# Altium PCB Weather Station v3 Home Edition.PcbDoc
Units mm, origin at the board's own origin, x right, y up, seen from the top; angles counter-clockwise.
Board outline 142.4 x 107.4 mm, 2 copper layers (Top Layer, Bottom Layer); 49 components, 44 nets, 199 pads, 33 vias.
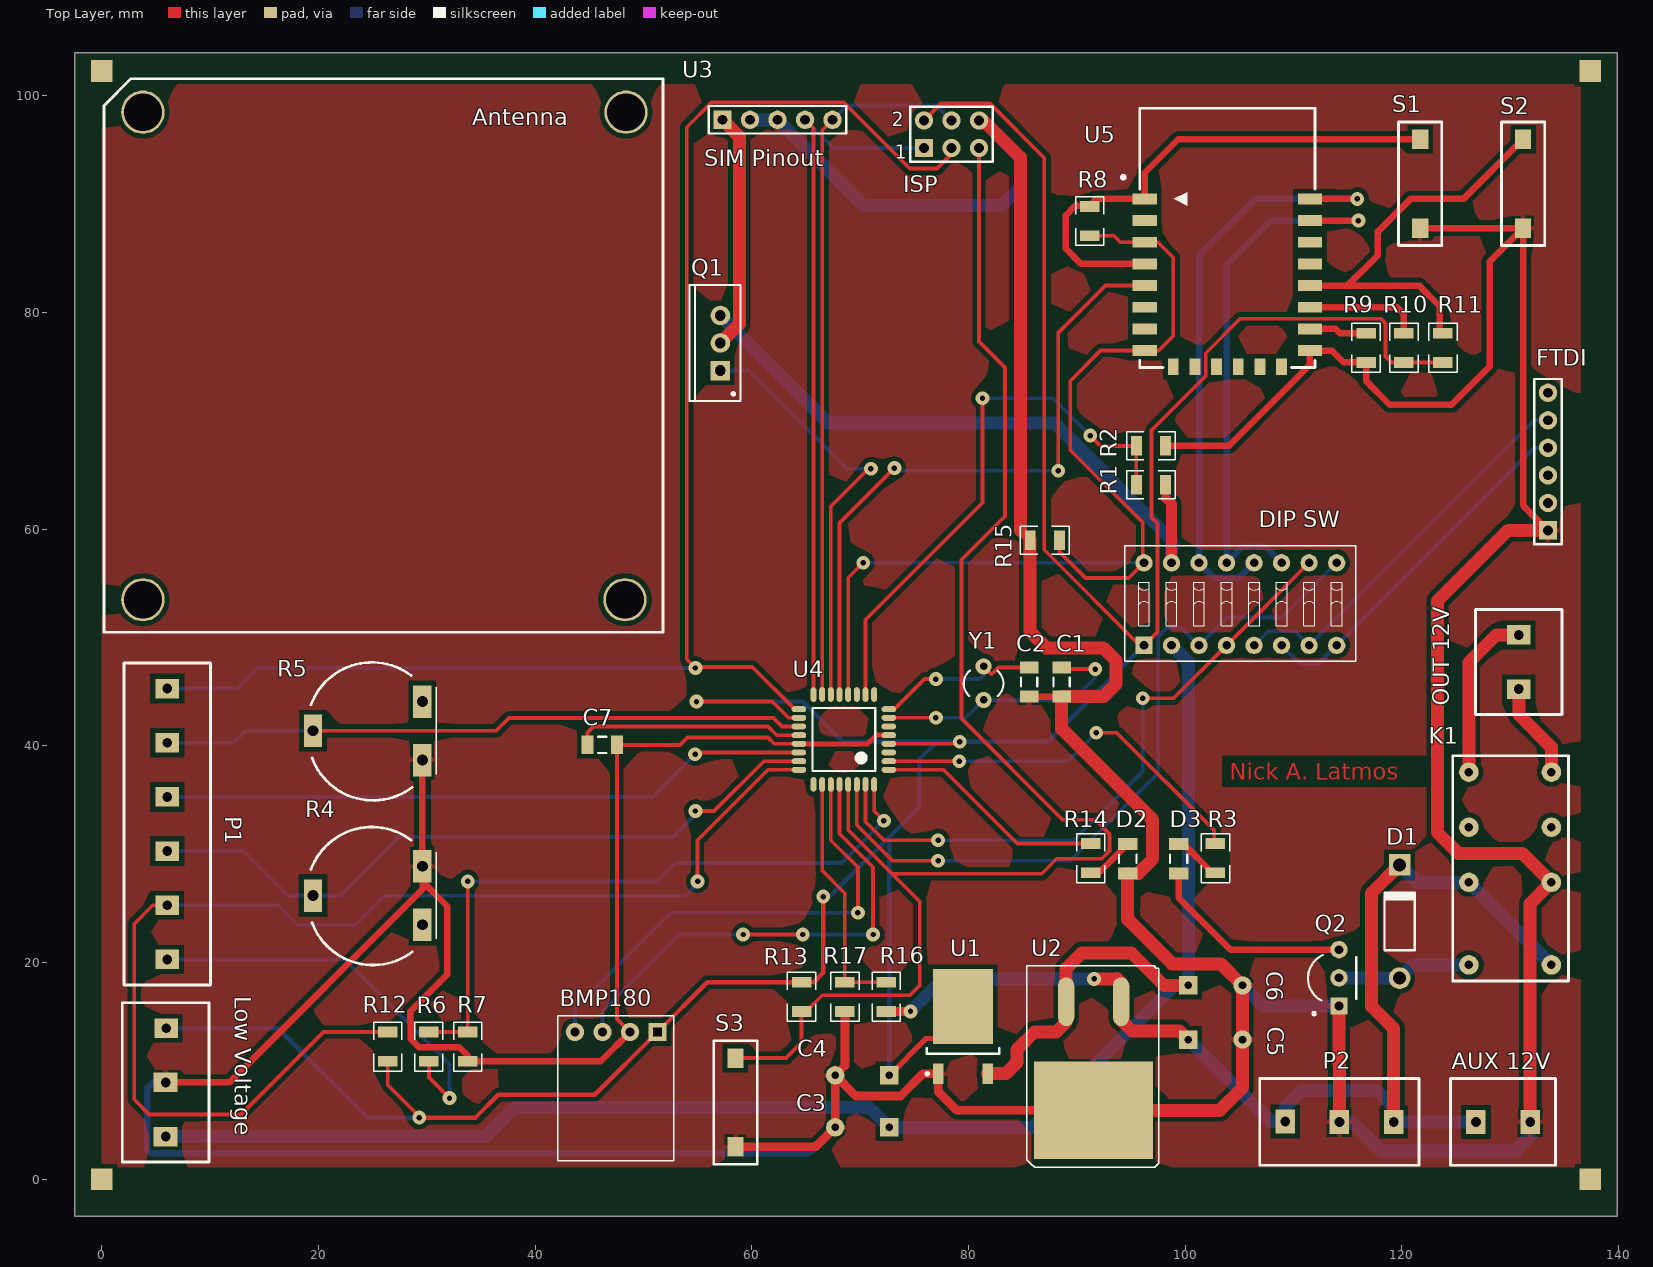
[diagram p0: Top Layer view]
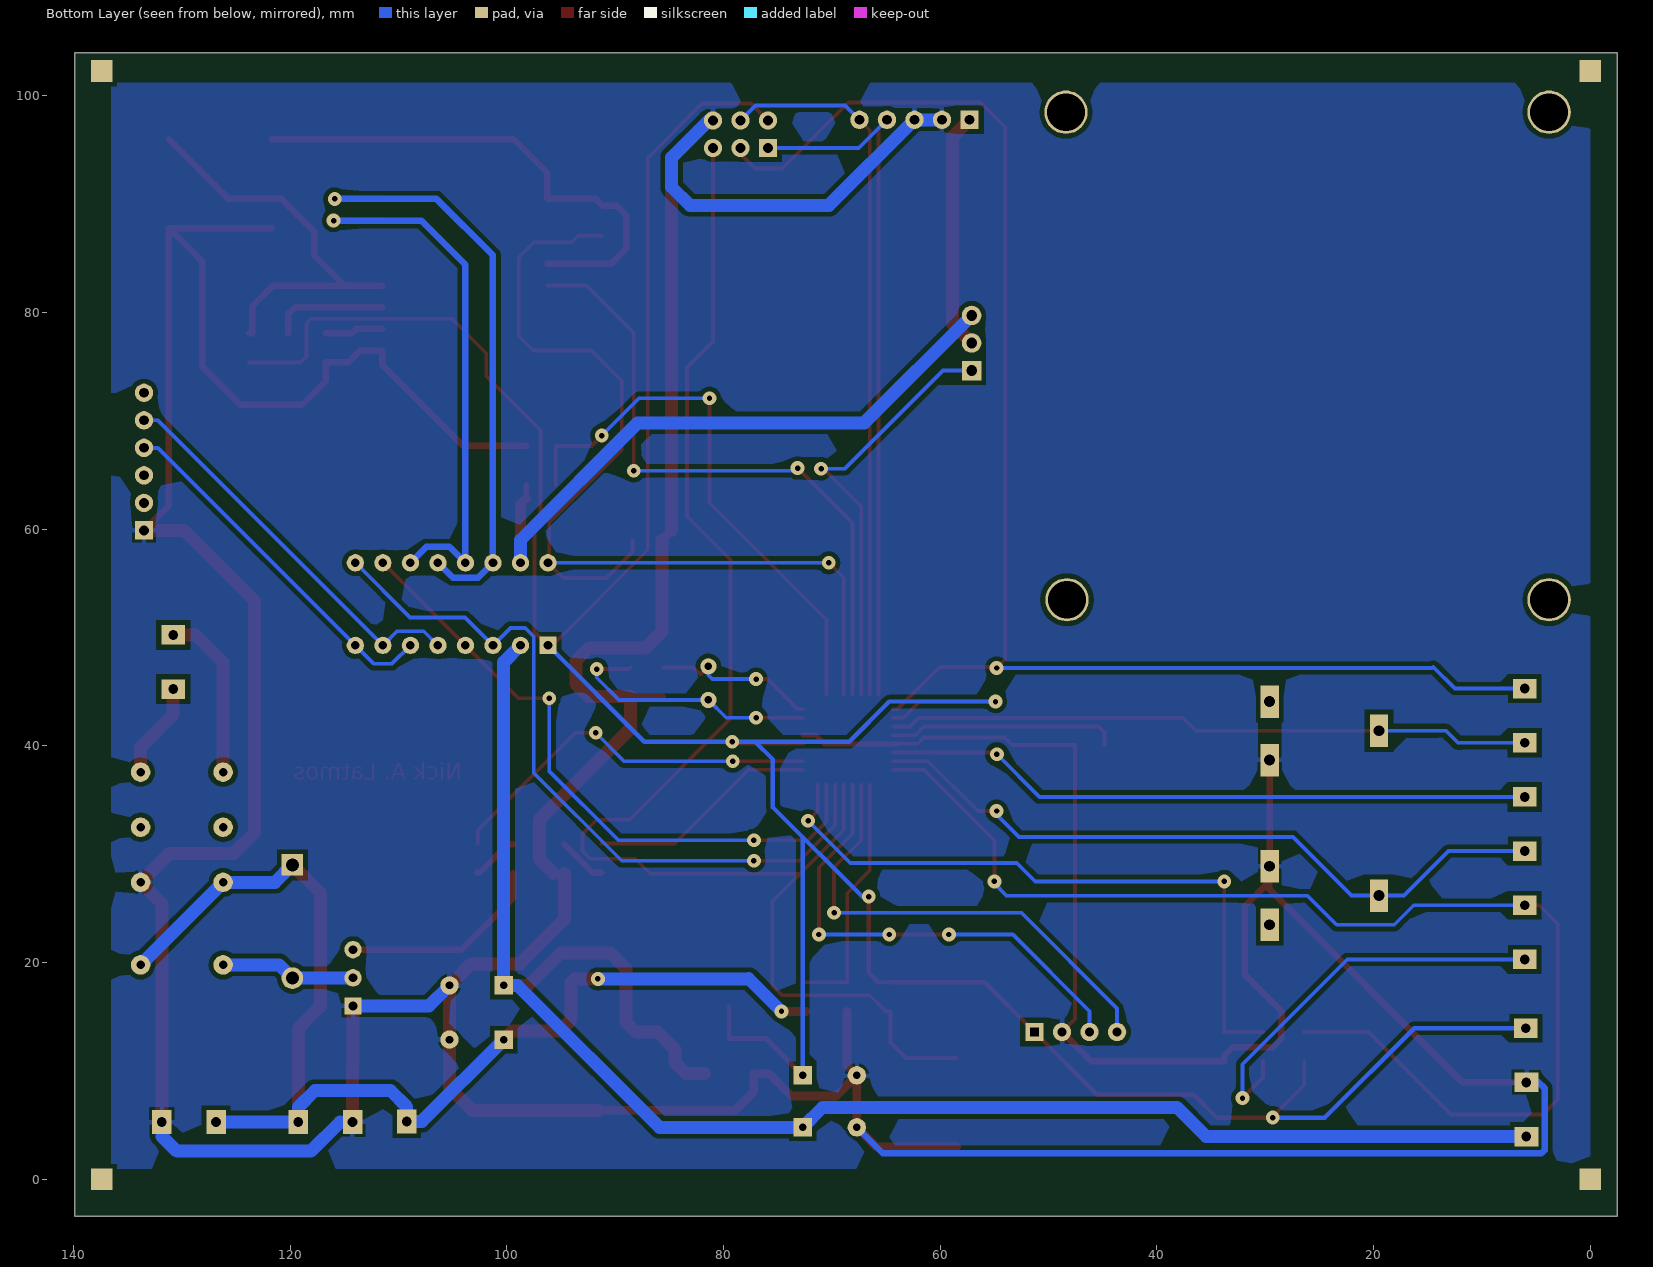
[diagram p1: Bottom Layer view, seen from below]

## Layer stack, top to bottom
Top Solder: solder mask 0.0102, Solder Resist, Dk 3.5
Top Layer: signal copper 0.0356
Dielectric 1: dielectric 0.32, FR-4, Dk 4.8
Bottom Layer: signal copper 0.0356
Bottom Solder: solder mask 0.0102, Solder Resist, Dk 3.5

## Board outline
-2.5,-3.4 -2.5,104 139.9,104 139.9,-3.4 -2.5,-3.4

## Design rules (kind name [scope] priority, off if disabled: settings)
Clearance "Polygon Clearance" [inPolygon] p1: gap=0.45
Clearance "HV to other nets Clearance" [InNetClass('HV')] p2: gap=0.254
Clearance "HV to HV Clearance" [InNetClass('HV') vs InNetClass('HV')] p3: gap=0.4
Clearance [All] p4: gap=0.254
HoleSize [All] p1: absolutevalues=TRUE maxlimit=4 minlimit=0.3 maxpercent=80.000 minpercent=20.000
HoleToHoleClearance [All] p1: gap=0.31 allowstackedmicrovias=TRUE
MinimumSolderMaskSliver [All] p1: minsoldermaskwidth=0.32
PolygonConnect [All] p1: connectstyle=Relief reliefconductorwidth=0.4 reliefentries=4 polygonreliefangle="90 Angle" airgapwidth=0.254
RoutingVias [All] p1: holewidth=0.5 width=1.27 viastyle="Through Hole" minholewidth=0.5 minwidth=1.27 maxholewidth=0.7 maxwidth=1.27
RoutingVias "HV vias" [InNetClass('HV')] p2: holewidth=0.7 width=1.4 viastyle="Through Hole" minholewidth=0.7 minwidth=1.4 maxholewidth=0.9 maxwidth=1.4
SMDNeckDown [All] p1: percent=85.000
SilkToSolderMaskClearance [IsPad] p1: minsilkscreentomaskgap=0.17 clearancetoexposedcopper=FALSE
SolderMaskExpansion [All] p1: expansion=0.102
UnpouredPolygon [All] p1: allowunpoured=FALSE
Width "GND Width" [InNet('GND')] p1: maxlimit=1.2 minlimit=0.35 preferedwidth=0.6
Width "Sensors Width" [InNetClass('Sensors')] p2: maxlimit=0.4 minlimit=0.254 preferedwidth=0.35
Width "Processor Width" [InNetClass('Processor')] p3: maxlimit=0.4 minlimit=0.254 preferedwidth=0.35
Width "LV Width" [InNetClass('LV')] p4: maxlimit=0.7 minlimit=0.4 preferedwidth=0.6
Width "HV Width" [InNetClass('HV')] p5: maxlimit=1.4 minlimit=1 preferedwidth=1.2
Width [All] p6: maxlimit=0.35 minlimit=0.254 preferedwidth=0.35
25 further rules are at their usual default settings.

## Classes and differential pairs
net class HV: 5V 12V_BAT GND GPRS_ENABLE MOSFET_DRAIN NetD1_1 NetK1_8 NetK1_9
net class LV: 3.3V CONNECTION_STATUS_LED GND GPRS_CONTROL_PIN GPRS_STATUS NetD2_1 NetD3_1 NetD3_2 NetR8_1 NetR9_1 NetR10_1 NetR11_1 ROUTER VALVE_CONTROL_PIN WIFI_ENABLE WIFI_RX WIFI_TX
net class Processor: 3.3V BATTERY_VOLTAGE CONNECTION_STATUS_LED DHT22_DATA DS18B20_DQ FLOW_METER GND GPRS_CONTROL_PIN GPRS_STATUS LDR_PIN MCU_RX0 MCU_RX1 MCU_TX0 MCU_TX1 NetC1_2 NetC2_1 NetC7_2 NetISP_5 RAIN_PIN ROUTER SCL0 SDA0 VALVE_CONTROL_PIN WIFI_ENABLE WIND_SENSOR
net class Sensors: 3.3V DHT22_DATA DS18B20_DQ FLOW_METER GND LDR_PIN NetP1_6 RAIN_PIN SCL0 SDA0 WIND_SENSOR

## Components (designator, comment, footprint, x,y, rotation, side; value= is the part's Value field where it differs from the comment)
"AUX 12V" "AUX 12V" "Connector (Clamp?)" 124.5,1.3 r0 top
BMP180 "BMP180" BMP180 53.1,14.6 r180 top
C1 "Cap Semi" C1206 88.6,45.9 r90 top
C2 "Cap Semi" C1206 85.6,45.9 r270 top
C3 "Cap2" CAPR5-4X5 70.2,4.8 r180 top
C4 "Cap2" CAPR5-4X5 70.2,9.6 r180 top
C5 "Cap2" CAPR5-4X5 102.8,12.9 r0 top
C6 "Cap2" CAPR5-4X5 102.8,17.9 r0 top
C7 "Cap Semi" C1206 46.2,40.1 r180 top
D1 "Diode 1N4004" DO-41 119.8,23.8 r90 top
D2 "LED0" INDC3216 94.7,29.6 r270 top
D3 "LED0" INDC3216 99.4,29.6 r270 top
"DIP SW" "418117170908" 418117170908 105.1,53.1 r0 top
FTDI "Header 6" HDR1X6 133.5,59.9 r90 top
ISP "Header 3X2" HDR2X3 75.9,95.2 r0 top
K1 "Relay-DPDT" "Sanyou Relay" 135,18.8 r90 top
"Low Voltage" "Clamp x3" "Connector x3 clamps" 9.9,1.6 r90 top
"OUT 12V" "Homemade Connector" "Connector (Clamp?)" 126.8,52.6 r270 top
P1 "Clamp" "Connector Clamp 6" 6,31.3 r270 top
P2 "Clamp x3" "Connector x3 clamps" 121.6,9.3 r180 top
Q1 "PMOS-2" TO-220AB 57.1,77.2 r90 top
Q2 "BC639-16ZL1G" ONSC-TO-92-3-29-11_AM_BL 114.2,18.6 r90 top
R1 "smd resistor 4x2mm" "smd resistor 4x2mm" 98.9,63 r90 top
R2 "smd resistor 4x2mm" "smd resistor 4x2mm" 98.9,66.6 r90 top
R3 "smd resistor 4x2mm" "smd resistor 4x2mm" 101.7,27.6 r0 top
R4 "RPot" "potentiometer (Piher)" 30.5,22.2 r90 top
R5 "RPot" "potentiometer (Piher)" 30.5,37.4 r90 top
R6 "smd resistor 4x2mm" "smd resistor 4x2mm" 29.1,10.2 r0 top
R7 "smd resistor 4x2mm" "smd resistor 4x2mm" 32.7,10.2 r0 top
R8 "smd resistor" "smd resistor 4x2mm" 92.3,90.5 r180 top
R9 "smd resistor 4x2mm" "smd resistor 4x2mm" 117.8,78.8 r180 top
R10 "smd resistor 4x2mm" "smd resistor 4x2mm" 121.3,78.8 r180 top
R11 "smd resistor 4x2mm" "smd resistor 4x2mm" 124.9,78.8 r180 top
R12 "smd resistor 4x2mm" "smd resistor 4x2mm" 27.5,14.3 r180 top
R13 "smd resistor 4x2mm" "smd resistor 4x2mm" 63.5,14.8 r0 top
R14 "smd resistor 4x2mm" "smd resistor 4x2mm" 90.2,27.6 r0 top
R15 "smd resistor 4x2mm" "smd resistor 4x2mm" 89.1,57.9 r90 top
R16 "smd resistor 4x2mm" "smd resistor 4x2mm" 71.3,14.8 r0 top
R17 "smd resistor 4x2mm" "smd resistor 4x2mm" 69.7,18.9 r180 top
S1 "SW-PB" "SMD push button 10x4" 121.7,86.9 r0 top
S2 "SW-PB" "SMD push button 10x4" 131.2,96.9 r180 top
S3 "SW-PB" "SMD push button 10x4" 58.5,12.1 r180 top
"SIM Pinout" "Header 5" HDR1X5 57.3,97.8 r0 top
U1 "LM1117DT-3.3" TD03B_N 79.5,14.1 r90 top
U2 "L7805" D2PAK 94.1,16.4 r180 top
U3 "SIM900" SIM900 1.8,51.5 r0 top
U4 "ATmega328P-AU" 32A_L 68.5,40.6 r180 top
U5 "ESP_12_E" ESP_12_E 95.9,90.5 r0 top
Y1 "XTAL" R38 81.4,45.8 r180 top

## Footprints (in the part's own frame and the unit in brackets; to place one, negate y for a bottom-side part, rotate by r counter-clockwise, add the part's x,y. Pads: shape width x height; smd on the part's side, far side on the other; paste and mask are expansions set on the pad)
32A_L [mm] "Thin QFP, 32-Leads, Body 7x7mm, Pitch 0.8mm, IPC High Density"
  oval 1.35x0.546 smd mask+0.15: 1(-4.15,2.8) 2(-4.15,2) 3(-4.15,1.2) 4(-4.15,0.4) 5(-4.15,-0.4) 6(-4.15,-1.2) 7(-4.15,-2) 8(-4.15,-2.8) 17(4.15,-2.8) 18(4.15,-2) 19(4.15,-1.2) 20(4.15,-0.4) 21(4.15,0.4) 22(4.15,1.2) 23(4.15,2) 24(4.15,2.8)
  oval 0.546x1.35 smd mask+0.15: 9(-2.8,-4.15) 10(-2,-4.15) 11(-1.2,-4.15) 12(-0.4,-4.15) 13(0.4,-4.15) 14(1.2,-4.15) 15(2,-4.15) 16(2.8,-4.15) 25(2.8,4.15) 26(2,4.15) 27(1.2,4.15) 28(0.4,4.15) 29(-0.4,4.15) 30(-1.2,4.15) 31(-2,4.15) 32(-2.8,4.15)
  silkscreen extent -2.9,-2.9 2.9,2.9, body extent -3.5,-3.5 3.5,3.5, height 1.2
418117170908 [mm] "08p, 2.54mm Pitch, Horizontal, Box Type, THT, flat Actuator, red, without Tape, Tube"
  rect 1.6x1.6 hole 0.8: 1(-8.89,-3.81)
  round 1.6 hole 0.8: 2(-6.35,-3.81) 3(-3.81,-3.81) 4(-1.27,-3.81) 5(1.27,-3.81) 6(3.81,-3.81) 7(6.35,-3.81) 8(8.89,-3.81) 9(8.89,3.81) 10(6.35,3.81) 11(3.81,3.81) 12(1.27,3.81) 13(-1.27,3.81) 14(-3.81,3.81) 15(-6.35,3.81) 16(-8.89,3.81)
  silkscreen extent -10.66,-5.3 10.66,5.4, body extent -10.66,-4.8 10.66,4.8, height 5.2
BMP180 [mm]
  rect 1.7x1.7 hole 0.8 square: 1(1.8,1)
  round 1.7 hole 0.8: 2(4.34,1) 3(6.88,1) 4(9.42,1)
  silkscreen extent 0.3,-0.5 11,12.9
C1206 [mm] "Chip Capacitor, Body 3.2x1.6mm, IPC High Density"
  rect 1.1x1.7 smd: 1(-1.35,0) 2(1.35,0)
  silkscreen extent -0.4,-0.75 0.4,0.75, body extent -1.7,-0.9 1.7,0.9, height 1.3
CAPR5-4X5 [mm] "Capacitor; 2 Leads"
  rect 1.7x1.7 hole 0.7: 1(-2.5,0)
  round 1.7 hole 0.7: 2(2.5,0)
"Connector (Clamp?)" [mm]
  rect 1.8x2.2 hole 0.9: 1(2.35,4) 2(7.35,4)
  silkscreen extent 0,0 9.7,8
"Connector Clamp 6" [mm]
  rect 1.8x2.2 hole 0.9: 1(-14,0.05) 2(-9,0.05) 3(-4,0.05) 4(1,0.05) 5(6,0.05) 6(11,0.05)
  silkscreen extent -16.35,-3.95 13.35,4.05
"Connector x3 clamps" [mm]
  rect 1.8x2.2 hole 0.9: 1(2.35,4) 2(7.35,4) 3(12.35,3.95)
  silkscreen extent 0,0 14.7,8
D2PAK [mm]
  oval 1.5x4.5 smd: 1(0,0) 3(5.08,0)
  rect 11x9 smd: 2(2.54,10.025)
  silkscreen extent -3.47,-3.3 8.7,15.3, body extent -2.62,0.05 7.59,13.54, height 3.81
DO-41 [mm] "Diode, Axial; Body 5.2 x 2.7 mm (LxDia. max), Lead Dia. 0.86 mm (max)"
  round 2 hole 1.2: 1(-5.23,0)
  rect 2x2 hole 1.2: 2(5.23,0)
  silkscreen extent -2.65,-1.4 2.75,1.4
ESP_12_E [mm] "ESP-12 Wi-Fi Module by AI-Thinker"
  rect 2.25x1 smd: 1(0.375,0) 2(0.375,-2) 3(0.375,-4) 4(0.375,-6) 5(0.375,-8) 6(0.375,-10) 7(0.375,-12) 8(0.375,-14) 15(15.625,-14) 16(15.625,-12) 17(15.625,-10) 18(15.625,-8) 19(15.625,-6) 20(15.625,-4) 21(15.625,-2) 22(15.625,0)
  rect 1x1.5 smd: 9(3,-15.5) 10(5,-15.5) 11(7,-15.5) 12(9,-15.5) 13(11,-15.5) 14(13,-15.5)
  silkscreen extent -1.75,-15.57 16.08,8.37, body extent 0,-15.49 16,8.51, height 2.75
HDR1X5 [mm] "Connector; Header; 5 Position"
  rect 1.7x1.7 hole 0.9: 1(0,0)
  round 1.7 hole 0.9: 2(2.54,0) 3(5.08,0) 4(7.62,0) 5(10.16,0)
  silkscreen extent -1.27,-1.27 11.43,1.27
HDR1X6 [mm] "Connector; Header; 6 Position"
  rect 1.7x1.7 hole 0.9: 1(0,0)
  round 1.7 hole 0.9: 2(2.54,0) 3(5.08,0) 4(7.62,0) 5(10.16,0) 6(12.7,0)
  silkscreen extent -1.27,-1.27 13.97,1.27
HDR2X3 [mm] "Connector; Header; 3x2 Position"
  rect 1.7x1.7 hole 0.9: 1(0,0)
  round 1.7 hole 0.9: 2(0,2.54) 3(2.54,0) 4(2.54,2.54) 5(5.08,0) 6(5.08,2.54)
  silkscreen extent -1.27,-1.27 6.35,3.81
INDC3216 [mm] "Chip Inductor, Body 3.2x1.6mm, IPC High Density"
  rect 1.1x1.8 smd: 1(-1.35,0) 2(1.35,0)
  silkscreen extent -0.4,-0.8 0.4,0.8, body extent -1.7,-0.9 1.7,0.9, height 0.55
ONSC-TO-92-3-29-11_AM_BL [mm] "TO, 3-Leads, Body Dia 4.7mm, Pitch 2.6mm"
  rect 1.6x1.6 hole 0.8: 1(-2.6,0)
  round 1.6 hole 0.8: 2(0,0) 3(2.6,0)
  silkscreen extent -3.42,-1.6 2.12,2.85, body extent -2.84,-1.34 2.84,2.36, height 8.92
"potentiometer (Piher)" [mm]
  rect 3x1.7 hole 1: 1(1.3,0.9) 2(6.7,0.9) 3(4,11)
  silkscreen extent -2.42,-0.4 10.32,11.19
R38 [mm] "Crystal, Thru-Hole; 2 Leads; Body 3.1 x 8.2 mm (Dia.xH)"
  round 1.5 hole 0.7: 1(0,1.55) 2(0,-1.55)
  silkscreen extent -1.83,-1.14 1.83,1.2
"Sanyou Relay" [mm] "Sanyou Relay"
  round 1.8 hole 0.8: 1(1,8.81) 4(8.62,8.81) 6(13.7,8.81) 8(18.78,8.81) 9(18.78,1.19) 11(13.7,1.19) 13(8.62,1.19) 16(1,1.19)
  silkscreen extent -0.5,-0.4 20.3,10.3
SIM900 [mm]
  round 4 hole 3.5: 6(2,47) 7(46.6,47) 8(46.5,2) 9(2,2)
  silkscreen extent -1.6,-1 50,50.1
"SMD push button 10x4" [mm]
  rect 1.5x1.8 smd: 1(0,0.9) 2(0,9.1)
  silkscreen extent -2,-0.7 2,10.7
"smd resistor 4x2mm" [mm]
  rect 1.8x1 smd: 1(1.1,0.7) 2(1.1,3.4)
  silkscreen extent -0.2,-0.2 2.4,4.3
TD03B_N [mm] "D-PAK, 4-Leads, Body 6.1x6.6mm, Pitch 2.29mm, Lead Span 9.7mm, IPC Medium Density"
  rect 1.9x0.95 smd: 1(-4.35,2.28) 3(-4.35,-2.28)
  rect 6.9x5.5 smd: 4(1.85,0)
  silkscreen extent -4.47,-3.35 -2,3.43, body extent -2.5,-3.35 3.7,3.35, height 2.38
TO-220AB [mm] "TO, Thru-Hole, Vertical, Heatsink Mounted; 3 In-Line Leads; Pitch 2.54 mm"
  rect 1.8x1.8 hole 1: 1(-2.54,0)
  round 1.8 hole 1: 2(0,0) 3(2.54,0)
  silkscreen extent -5.35,-1.85 5.35,2.85, body extent -5.4,-1.9 5.4,2.9, height 19.3

## Part data
"AUX 12V" "OUT 12V": library part "Header 2", "Klema"
C1 C2 C7: "Capacitor (Semiconductor SIM Model)"
C3 C4 C5 C6: "Capacitor"
D1: "1 Amp General Purpose Rectifier"
D2 D3: "SMD led"
"DIP SW": "2.54 mm Compact THT Dip Switch with Flat Actuator WS-DITV"
FTDI: "Header, 6-Pin"
ISP: "Header, 3-Pin, Dual row"
K1: "Dual-Pole Dual-Throw Relay"
P1: library part "Header 6", "Header, 6-Pin"
Q1: "P-Channel Power MOSFET"
Q2: "High Current Transistor, NPN Silicon, 3-Pin TO-92, Pb-Free, Ammo Box"
R1 R2 R3 R6 R7 R8 R9 R10 R11 R12 R13 R14 R15 R16 R17: library part Res3
R4 R5: "Potentiometer"
S1 S2 S3: "Switch"
"SIM Pinout": "Header, 5-Pin"
U1: "800mA Low-Dropout Linear Regulator, 3-pin TO-252"
U2: library part L7805-D2PAK, "LINEAR REGULATOR 5.0V"
U4: "8-bit AVR Microcontroller, 32KB Flash, 1KB EEPROM, 2KB SRAM, 32-pin TQFP, Industrial Grade (-40°C to 85°C)"
U5: "ESP-12 Wi-Fi Module by AI-Thinker"
Y1: "Crystal Oscillator"

## Free pads (board coordinates)
  rect 2x2 all layers, no hole: 1(0,0) 1(0,102.3) 1(137.4,0) 1(137.4,102.3)

## Via types
v1: diameter 1.27, hole 0.5, Top Layer to Bottom Layer, 33 vias

## Nets (pads, with @x,y where several pads share a name; then routed paths per layer and width w, separated by ;. In a path a pad name is that pad's centre, name@x,y a point inside that pad or via, vN(x,y) a via of type N, cw(c..) or ccw(c..) an arc to the next point about the centre after c; other vN are vias at no path point)
3.3V: "DIP SW.1" "Low Voltage.3" BMP180.1 C4.1 ISP.2 R10.2 R11.2 R12.2 R13.2 U1.4 U4.4 U4.18 | length 321.6
  Top Layer w0.35: R12.2 26.4,8.7 v1@29.4,5.7 ; v1(54.9,44.1) 61.9,44.1 63.4,42.6 U4.18 ; R13.2 65.716,18.2 ; U4.4 79,40.2 v1(79.2,40.4) ; ISP.2 77.46,99.3 81.981,99.3 87,94.281 87,58.112 95.822,49.29 96.21,49.29 97.441,50.521 97.441,60.559 96.9,61.1 96.9,69.143 101.9,74.143 101.9,76.26 105.086,79.446 118.054,79.446 118.5,79 118.5,75.938 119.038,75.4 R10.2 R11.2 ; U1.4@79.5,13 U1.4
  Top Layer w0.4: v1@29.4,5.7 34.5,5.7 36.6,7.8 45.5,7.8 BMP180.1 55.9,18.2 R13.2 ; 65.716,18.2 66.6,19.084 v1(66.6,26.1)
  Top Layer w0.5: C4.1 76.1,13 U1.4@79.5,13
  Bottom Layer w0.35: v1(66.6,26.1) v1@67.208,26.1 ; 72.7,31.581 75.446,34.327
  Bottom Layer w0.4: 5.95,13.95 16.25,13.95 24.5,5.7 v1(29.3,5.7) ; v1(54.9,44.1) 64.7,44.1 68.4,40.4 77.1,40.4 ; v1@67.208,26.1 75.444,34.336 ; C4.1 72.7,31.581 ; 75.446,34.327 75.446,38.746 77.1,40.4 ; 96.21,49.29 87.32,40.4 v1(79.2,40.4) 77.1,40.4
5V: "DIP SW.2" "Low Voltage.1" C3.1 C6.1 U1.3 U2.3 | length 161.7
  Top Layer w1.2: U1.3 83.45,9.75 84.5,10.8 84.5,12 86.1,13.6 88.1,13.6 89.02,14.52 89.02,19.457 90.463,20.9 95.05,20.9 98.05,17.9 C6.1
  Bottom Layer w1.2: 5.9,3.95 35.457,3.95 38.132,6.625 70.875,6.625 C3.1 85.915,4.8 99.015,17.9 C6.1 100.3,47.74 98.75,49.29
12V_BAT: "AUX 12V.1" C5.1 D1.2 K1.4 K1.16 P2.1 P2.3 R16.1 U2.1 | length 110.7
  Top Layer w0.8: R16.1 v1(74.657,15.5)
  Top Layer w1.2: v1(91.6,18.5) 93.682,18.5 93.719,18.537 94.1,18.156 U2.1 94.1,14.7 95.1,13.7 99.5,13.7 C5.1 ; P2.1 119.25,13.924 117.2,15.974 117.2,26.43 D1.2
  Bottom Layer w1.2: v1(74.657,15.5) 77.694,18.537 77.731,18.5 v1(91.6,18.5) ; C5.1 107.85,5.35 P2.3 109.25,6.699 110.751,8.2 117.709,8.2 119.25,6.659 P2.1 120.758,5.3 126.85,5.3 ; D1.2 121.41,27.42 K1.4 K1.16
BATTERY_VOLTAGE: R16.2 R17.1 U4.26 | length 22.9
  Top Layer w0.35: U4.26 66.5,28.5 68.586,26.414 68.586,18.2 R17.1 70.491,18.2 ; 70.491,18.2 R16.2
CONNECTION_STATUS_LED: R14.2 U4.1 | length 21.5
  Top Layer w0.35: U4.1 77.7,37.8 84.5,31 R14.2
DHT22_DATA: ISP.3 P1.1 U4.17 | length 140.1
  Top Layer w0.35: U4.17 63.938,43.4 60.049,47.289 54.889,47.289 v1(54.8,47.2) 54,48 54,97.118 56.282,99.4 68.5,99.4 74.585,93.315 77.115,93.315 78.44,94.64 ISP.3
  Bottom Layer w0.35: P1.1 12.5,45.3 14.489,47.289 14.577,47.2 v1(54.8,47.2)
DS18B20_DQ: P1.5 R12.1 U4.24 | length 114.4
  Top Layer w0.35: P1.5 4.712,25.3 2.996,23.584 2.996,7.371 4.371,5.996 12.856,5.996 20.46,13.6 R12.1 ; v1(55,27.5) 55,31.3 61.5,37.8 U4.24
  Bottom Layer w0.35: P1.5 16.3,25.3 18.1,23.5 23.409,23.5 26.092,26.183 53.88,26.183 55,27.303 v1(55,27.5)
FLOW_METER: R6.2 R7.2 U4.32 | length 62
  Top Layer w0.35: R6.2 R7.2@33.788,13.6 ; v1(33.788,27.503) R7.2@33.788,13.6 ; R7.2 R7.2@33.788,13.6 ; U4.32 71.3,34 v1(72.2,33.1)
  Bottom Layer w0.35: v1(33.788,27.503) 51.238,27.503 52.935,29.2 68.3,29.2 v1(72.2,33.1)
FTDI_RX: "DIP SW.5" "DIP SW.7" FTDI.5 | length 36.8
  Bottom Layer w0.35: 106.37,49.29 107.672,50.592 110.148,50.592 111.45,49.29 132.22,70.06 FTDI.5
FTDI_TX: "DIP SW.6" "DIP SW.8" FTDI.4 | length 33.5
  Bottom Layer w0.35: 108.91,49.29 110.6,47.6 112.3,47.6 113.99,49.29 132.22,67.52 FTDI.4
GND: "AUX 12V.2" "Low Voltage.2" "SIM Pinout.2" "SIM Pinout.3" BMP180.2 C1.1 C2.2 C3.2 C4.2 C5.2 C6.2 C7.1 D2.2 FTDI.1 ISP.6 K1.13 P2.2 Q2.1 R2.1 R4.2 R5.1 R7.1 R9.2 R15.2 R17.2 S1.1 S2.2 S3.2 U1.1 U2.2 U4.5 U4.21 U5.15 | length 627.1
  Top Layer w0.35: BMP180.2 47.55,14.81 C7.1 53.38,40.1 54.067,40.787 61.497,40.787 62.071,40.213 U4.21@63.937,40.213
  Top Layer w0.467: U4.21@63.937,40.213 63.95,40.2 U4.21 70.682,40.2 71.482,41 U4.5
  Top Layer w0.6: 5.9,8.95 11.783,8.95 29.6,26.767 29.625,26.767 R4.2@29.617,27.483 ; R5.1 R4.2 29.6,27.5 R4.2@29.617,27.483 ; BMP180.2 46.06,10.9 R7.1 33.8,11.4 33,12.2 29.28,12.2 28.529,12.951 28.529,14.515 28.5,14.544 28.5,15.51 31.9,18.91 31.9,25.2 R4.2@29.617,27.483 ; C2.2 C1.1 C1.1@88.601,44.55 ; D2.2 95.688,28.25 ; R2.1 104.033,67.7 111.525,75.192 U5.15 113.544,76.5 114.644,75.4 R9.2 116.7,73.7 118.9,71.5 124.6,71.5 128.1,75 128.1,84.7 S2.2 ; 114.2,10.662 114.25,10.612 ; S1.1 S2.2 ; FTDI.1 131.2,62.2 S2.2
  Top Layer w0.8: S3.2 65.9,3 C3.2 C4.2 ; R17.2 68.6,10.5 C4.2 ; U2.2 78.925,6.375 77.22,8.08 U1.1 75.776,9.75 73.726,7.7 69.6,7.7 C4.2
  Top Layer w0.84: 84.8,59.9 R15.2
  Top Layer w1.2: ISP.6 81.36,97.74 84.8,94.3 84.8,59.9 ; R15.2 85.7,50.541 87.179,49.062 92.438,49.062 93.6,47.9 93.6,45.7 92.45,44.55 88.601,44.55 88.601,41.584 97,33.185 97,29.562 95.688,28.25 ; U2.2 103.206,6.375 105.3,8.469 C5.2 C6.2 103.3,19.9 98.8,19.9 94.7,24 D2.2 ; 114.2,10.662 Q2.1 ; P2.2 114.25,10.612 ; 131.85,5.3 131.85,25.46 K1.13 131.13,30.1 125.2,30.1 123.3,32 123.3,53.4 129.8,59.9 FTDI.1
  Bottom Layer w0.6: 5.9,8.95 4.745,8.95 4.223,8.428 4.223,2.688 4.502,2.408 65.308,2.408 C3.2 ; P2.2 115.398,5.3 ; 131.85,3.975 131.85,5.3
  Bottom Layer w1.2: 59.84,97.8 62.38,97.8 70.28,89.9 83.1,89.9 84.8,91.6 84.8,94.3 81.36,97.74 ISP.6 ; C6.2 107.2,16 Q2.1 ; 115.398,5.3 118.098,2.6 130.475,2.6 131.85,3.975
GPRS_CONTROL_PIN: Q1.1 U4.14 | length 40.2
  Top Layer w0.35: U4.14 67.3,62.1 70.8,65.6 v1(71,65.6)
  Bottom Layer w0.35: Q1.1 59.74,74.66 68.8,65.6 v1(71,65.6)
GPRS_ENABLE: "DIP SW.15" Q1.3 R1.1 | length 59.8
  Top Layer w0.5: 98.2,62.86 R1.1
  Top Layer w0.85: 98.2,62.86 98.75,62.31
  Top Layer w1: 98.75,56.91 98.75,62.31
  Bottom Layer w1.2: Q1.3 67.005,69.835 87.93,69.835 98.75,59.015 98.75,56.91
GPRS_STATUS: R1.2 R2.2 U4.10 | length 51.4
  Top Layer w0.35: U4.10 70.5,51.652 81.3,62.452 v1(81.3,72.1) ; v1(91.243,68.651) 92.194,67.7 R2.2 95.5,65.883 R1.2
  Bottom Layer w0.35: v1(81.3,72.1) 87.794,72.1 v1(91.243,68.651)
LDR_PIN: P1.4 R4.3 U4.23 | length 65.3
  Top Layer w0.35: v1(54.8,34) 56.519,34 61.119,38.6 U4.23
  Bottom Layer w0.35: P1.4 13.1,30.3 17.2,26.2 R4.3 22.045,26.2 27.445,31.6 52.733,31.6 54.8,33.667 v1(54.8,34)
MCU_RX0: "DIP SW.3" "DIP SW.9" U4.30 | length 69.5
  Top Layer w0.35: U4.30 69.7,32.7 73,29.4 v1(77.2,29.4)
  Bottom Layer w0.35: v1(77.2,29.4) 89.4,29.4 97.517,37.517 97.517,50.109 98.307,50.9 99.68,50.9 101.29,49.29 103.862,51.862 108.942,51.862 113.99,56.91
MCU_RX1: "SIM Pinout.4" ISP.1 U4.16 | length 65.4
  Top Layer w0.35: 64.92,97.8 65.7,97.02 U4.16
  Bottom Layer w0.35: 64.92,97.8 67.52,95.2 ISP.1
MCU_TX0: "DIP SW.4" "DIP SW.10" U4.31 | length 59.6
  Top Layer w0.35: U4.31 70.5,33 72.2,31.3 v1(77.2,31.3) ; v1(96.1,44.4) 98.94,44.4 103.83,49.29 111.45,56.91
  Bottom Layer w0.35: v1(77.2,31.3) 89.7,31.3 96.1,37.7 v1(96.1,44.4)
MCU_TX1: "SIM Pinout.5" ISP.4 U4.15 | length 65.6
  Top Layer w0.35: U4.15 66.5,96.84 67.46,97.8
  Bottom Layer w0.35: 67.46,97.8 68.791,99.131 77.049,99.131 ISP.4
MOSFET_DRAIN: "SIM Pinout.1" Q1.2 | length 22
  Top Layer w1.2: Q1.2 58.858,78.958 58.858,96.242 57.3,97.8
NetC1_2: C1.2 U4.7 Y1.1 | length 24.5
  Top Layer w0.35: U4.7 v1(77,42.6) ; C1.2 88.75,47.1 v1(91.7,47.1)
  Bottom Layer w0.35: v1(77,42.6) 79.75,42.6 Y1.1 89.65,44.25 91.7,46.3 v1(91.7,47.1)
NetC2_1: C2.1 U4.8 Y1.2 | length 15.6
  Top Layer w0.35: U4.8 73.184,43.4 75.956,46.172 v1(77,46.172) ; Y1.2 82.129,46.621 82.758,47.25 C2.1
  Bottom Layer w0.35: v1(77,46.172) 81.044,46.172 81.4,46.528 Y1.2
NetC7_2: C7.2 U4.20 | length 21.2
  Top Layer w0.35: C7.2 44.85,41.258 45.396,41.804 61.496,41.804 62.3,41 U4.20
NetD1_1: D1.1 K1.1 Q2.2 | length 12.5
  Bottom Layer w1.2: Q2.2 118.615,18.6 D1.1 121.03,19.8 K1.1
NetD2_1: D2.1 R14.1 | length 4.5
  Top Layer w0.6: R14.1 92.05,28.3 D2.1
NetD3_1: D3.1 R3.1 | length 4.5
  Top Layer w0.6: D3.1 99.85,30.95 102.5,28.3 R3.1
NetD3_2: D3.2 Q2.3 | length 19
  Top Layer w0.6: D3.2 99.4,26 104.2,21.2 Q2.3
NetISP_5: ISP.5 R13.1 S3.1 U4.29 | length 138.6
  Top Layer w0.35: S3.1 63.176,11.2 64.6,12.624 R13.1 65.005,15.5 66.505,17 74.6,17 75.5,17.9 75.5,25.659 72.945,28.215 ; U4.29 68.9,32.259 72.945,28.215 ; ISP.5 80.98,77.34 83.371,74.949 83.371,61.211 79.356,57.196 79.356,42.54 88.696,33.2 91.7,33.2 93.02,31.88 93.02,30.32 92.3,29.6 88.158,29.6 86.773,28.215 72.945,28.215
NetK1_8: "OUT 12V.1" K1.8 | length 15.8
  Top Layer w1.2: K1.8 126.19,47.707 128.733,50.25 130.8,50.25
NetK1_9: "OUT 12V.2" K1.9 | length 8.9
  Top Layer w1.2: 130.8,45.25 130.8,42.909 133.81,39.899 K1.9
NetP1_6: P1.6 R6.1 | length 37.4
  Top Layer w0.35: R6.1 30.2,9.4 v1(32.1,7.5)
  Bottom Layer w0.35: P1.6 22.424,20.3 32.1,10.624 v1(32.1,7.5)
NetR8_1: R8.1 S1.2 U5.1 U5.4 | length 48
  Top Layer w0.6: U5.4 90.4,84.5 89,85.9 89,89 89.847,89.847 91.153,89.847 91.806,90.5 U5.1 96.275,92.911 99.364,96 S1.2
NetR9_1: R9.1 U5.16 | length 5.3
  Top Layer w0.6: U5.16 113.9,78.5 114.3,78.1 R9.1
NetR10_1: R10.1 U5.17 | length 10.7
  Top Layer w0.6: U5.17 119.564,80.5 120.199,79.865 R10.1
NetR11_1: R11.1 S2.1 U5.18 | length 38.6
  Top Layer w0.6: U5.18 115,82.5 ; R11.1 123.5,78.1 123.5,80.6 121.6,82.5 115,82.5 ; S2.1 125.7,90.5 120.8,90.5 117.8,87.5 117.8,85.3 115,82.5
RAIN_PIN: P1.2 R5.3 U4.19 | length 59.6
  Top Layer w0.35: R5.3 36.407,41.4 37.598,42.591 61.4,42.591 62.009,42.591
  Top Layer w0.4: 62.009,42.591 62.8,41.8 U4.19
  Bottom Layer w0.35: P1.2 12.224,40.3 13.324,41.4 R5.3
ROUTER: U4.13 U5.5 | length 60.8
  Top Layer w0.35: U4.13 68.1,60.585 v1(73.169,65.654) ; v1(88.3,65.4) 88.3,78.16 92.64,82.5 U5.5
  Bottom Layer w0.35: v1(73.169,65.654) 73.424,65.4 v1(88.3,65.4)
SCL0: BMP180.3 U4.28 | length 45
  Top Layer w0.35: v1(59.2,22.6) v1(64.7,22.6) ; U4.28 68.1,31.9 71.2,28.8 v1(71.2,22.6)
  Bottom Layer w0.35: BMP180.3 46.22,15.52 53.3,22.6 v1(59.2,22.6) ; v1(64.7,22.6) v1(71.2,22.6)
SDA0: BMP180.4 U4.27 | length 44.8
  Top Layer w0.35: U4.27 67.3,31.3 69.8,28.8 v1(69.8,24.6)
  Bottom Layer w0.35: BMP180.4 43.68,15.78 52.5,24.6 v1(69.8,24.6)
VALVE_CONTROL_PIN: R3.2 U4.2 | length 36.1
  Top Layer w0.35: U4.2 v1(79.153,38.6) ; v1(91.802,41.219) 93.681,41.219 102.7,32.2 R3.2@102.7,31
  Bottom Layer w0.35: v1(79.153,38.6) 89.182,38.6 v1(91.802,41.219)
WIFI_ENABLE: "DIP SW.16" R8.2 R15.1 U4.12 U5.3 U5.8 | length 95.8
  Top Layer w0.35: U4.12 68.9,55.527 v1(70.283,56.91) ; R15.1 88.4,57.9 90.8,55.5 94.8,55.5 96.21,56.91 96.1,57.02 96.1,60.6 89.4,67.3 89.4,73.7 92.2,76.5 U5.8 97.568,76.5 98.9,77.832 98.9,85.099 97.499,86.5 U5.3 94.027,86.5 93.427,87.1 R8.2
  Bottom Layer w0.35: v1(70.283,56.91) 96.21,56.91
WIFI_RX: "DIP SW.11" "DIP SW.13" U5.21 | length 52.2
  Top Layer w0.6: U5.21 v1(116,88.5)
  Bottom Layer w0.6: 108.91,56.91 107.43,58.39 105.31,58.39 103.83,56.91 103.83,84.43 107.9,88.5 v1(116,88.5)
WIFI_TX: "DIP SW.12" "DIP SW.14" U5.22 | length 55.7
  Top Layer w0.6: U5.22 v1(115.9,90.5)
  Bottom Layer w0.6: 106.37,56.91 105.005,55.545 102.655,55.545 101.29,56.91 101.29,85.29 106.5,90.5 v1(115.9,90.5)
WIND_SENSOR: P1.3 U4.22 | length 60
  Top Layer w0.35: v1(54.769,39.238) 54.93,39.4 U4.22
  Bottom Layer w0.35: P1.3 50.83,35.3 v1(54.769,39.238)
pads on no net: FTDI.2 FTDI.3 FTDI.6 K1.6 K1.11 R4.1 R5.2 U3.6 U3.7 U3.8 U3.9 U4.3 U4.6 U4.9 U4.11 U4.25 U5.2 U5.6 U5.7 U5.9 U5.10 U5.11 U5.12 U5.13 U5.14 U5.19 U5.20

## Polygon pours and split planes (outlines as drawn)
GND on Top Layer "Top Layer Polygon Pour" (solid, pour order 10): -0.1,101.2 0,101.1 0,1.1 136.3,1.1 136.5,1.3 136.5,101.1 0.1,101.1 0,101.2
GND on Bottom Layer "Bottom Layer Polygon Pour" (solid, pour order 12): 0,101.2 0,1 136.5,1 136.5,101.2 0,101.2

## Other copper
Top Layer:
  text "Nick A. Latmos" at 104.1,36.9 h1.52

## Text inside footprints (layer, text, board x,y; h text height)
ISP: Top Overlay "1" at 73.2,94.2 h1.27; Top Overlay "2" at 72.9,97.2 h1.27
U3: Top Overlay "Antenna" at 34.2,97.3 h1.52
U5: Mechanical 13 "ANTENNA AREA" at 96.027,98.374 h0.25; Mechanical 13 "CUTOUT POLYGON" at 96.027,97.866 h0.25